# EAGLE board xmosio2_unrouted (EAGLE 7.6.0)
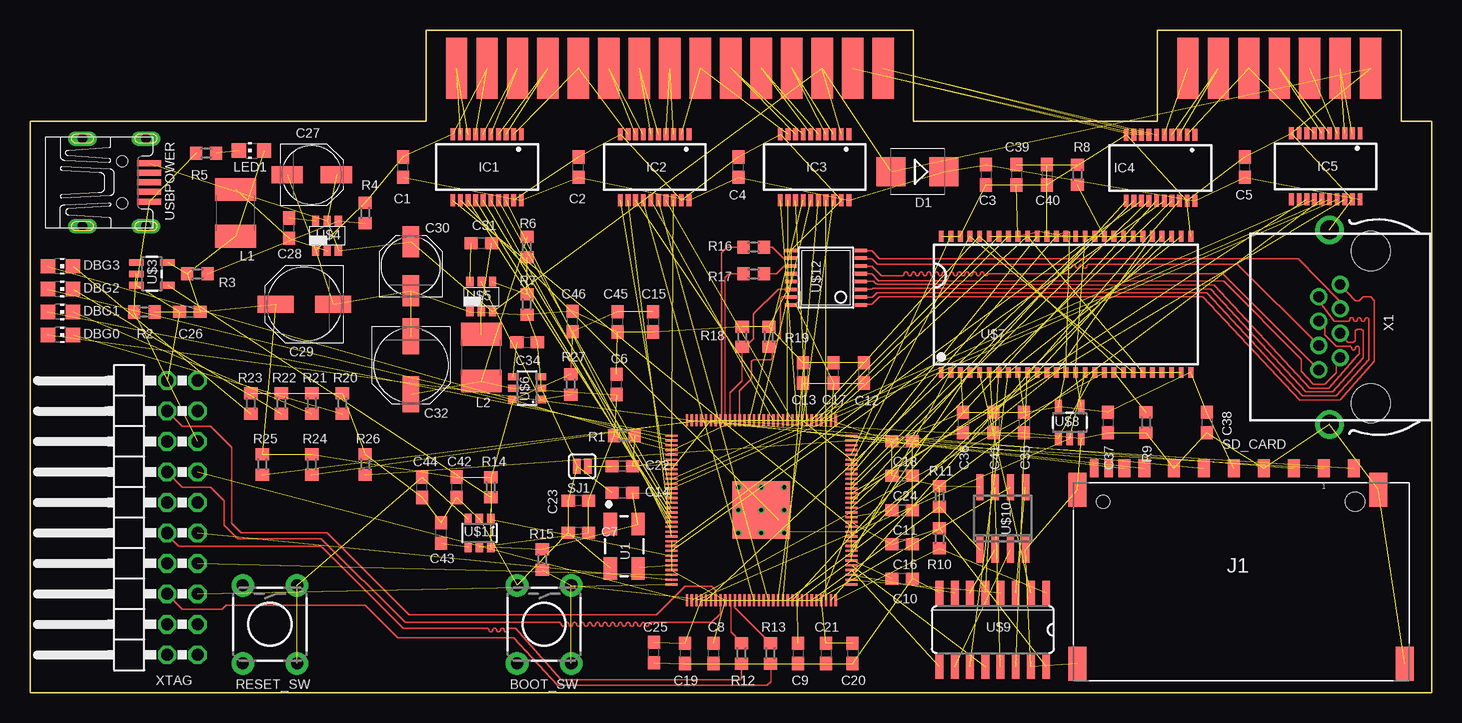
[diagram p0: board, top side]
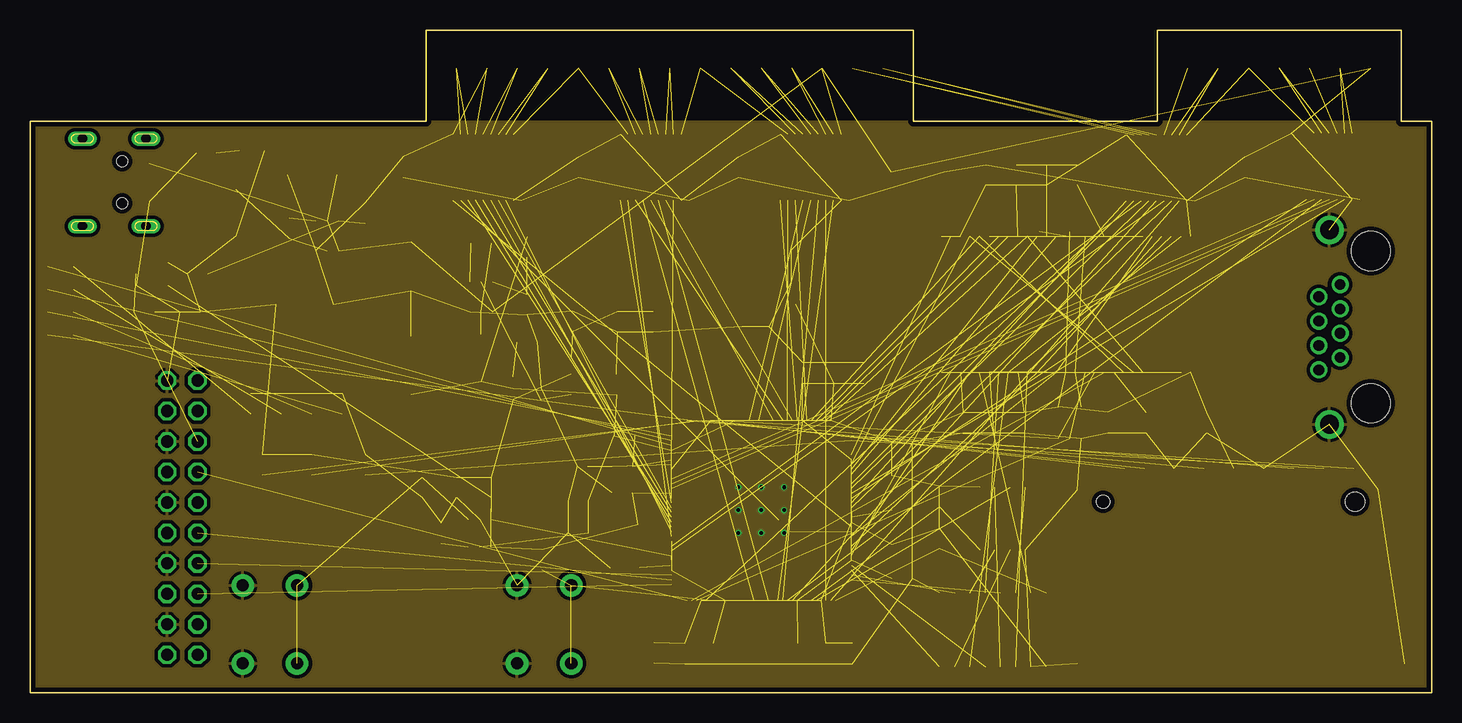
[diagram p1: board, inner layer Route2]
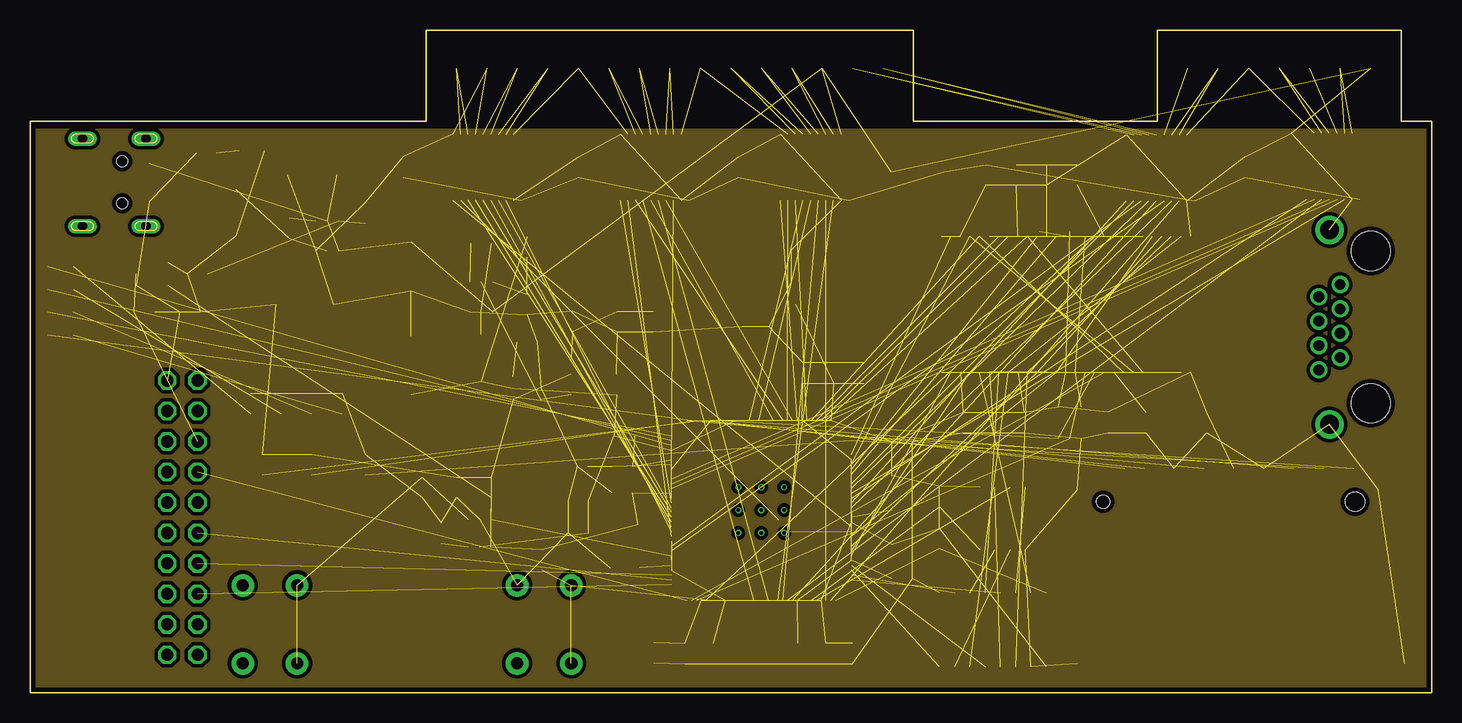
[diagram p2: board, inner layer Route15]
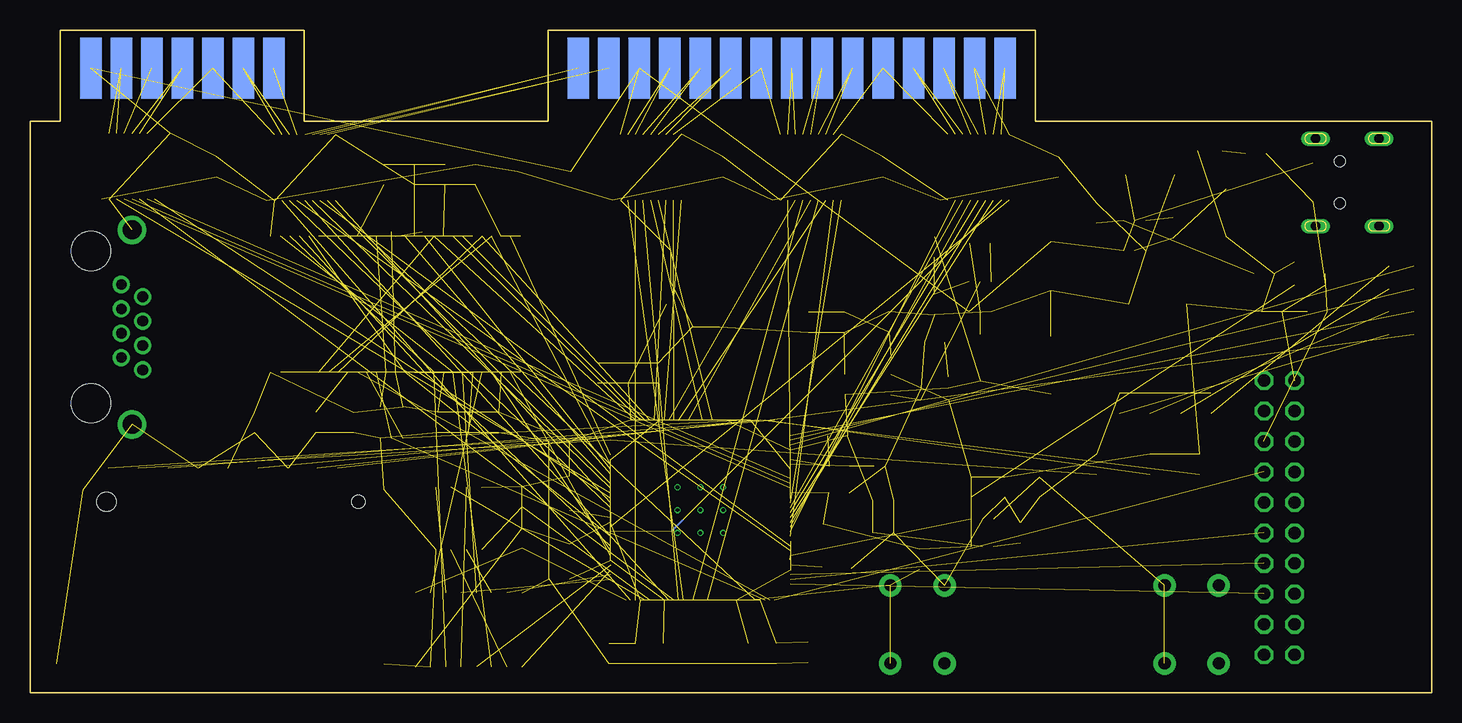
[diagram p3: board, bottom side, seen from below]

Size 116.84 x 55.24 mm. Coordinates in mm from the lower left corner, seen from the top.
Outline: 0,47.62 33.02,47.62 33.02,55.24 73.66,55.24 73.66,47.62 93.98,47.62 93.98,55.24 114.3,55.24 114.3,47.62 116.84,47.62 116.84,0 0,0 0,47.62
Copper layers (1*2*15*16): Top 0.035559375mm / dielectric 0.17018125mm / Route2 0.01778125mm / dielectric 47mil / Route15 0.01778125mm / dielectric 0.17018125mm / Bottom 0.035559375mm
Design rules "oshpark-4layer": minimum track width 5mil, minimum drill 10mil, track to track 5mil, track to pad 5mil, pad to pad 5mil, via to via 5mil, smd to smd 5mil, copper to edge 15mil, drill to drill 6mil, minimum pad ring 4mil, minimum via ring 4mil, stop-mask expansion 2.5mil, vias tented up to drill 0mil, thermal gap 10mil
Net classes: 1 Power: width 0.305 mm, drill 0.203 mm, clearance 0.203 mm
vRestrict: area 54.3,21.9 to 67.6,23.5; area 67.6,8.6 to 69.2,21.6; area 54.3,7 to 67.6,8.6; area 52.7,8.6 to 54.3,21.9

## Footprints (pad centres in the part's own frame; a part is rotated, then mirrored left to right if it is on the bottom)
TACTILE-PTH = drill 1.016 pad 1.88: 1 -3.251,2.261; 2 3.251,2.261; 3 -3.251,-2.261; 4 3.251,-2.261
C0603 = smd 1.1 x 1: 1 -0.85,0; 2 0.85,0
PANASONIC_C = smd 2.6 x 1.4: + 2.05,0; - -2.05,0
PANASONIC_D = smd 3 x 1.4: + 2.4,0; - -2.4,0
SMB = smd 2.4 x 2.4: A 2.2,0; C -2.2,0
CHIP-LED0805 = smd 1.2 x 1.2: A 0,-1.05; C 0,1.05
QSOP20 = smd 0.4 x 1: 1 -2.858,-2.75; 2 -2.223,-2.75; 3 -1.588,-2.75; 4 -0.953,-2.75; 5 -0.318,-2.75; 6 0.318,-2.75; 7 0.953,-2.75; 8 1.588,-2.75; 9 2.223,-2.75; 10 2.858,-2.75; 11 2.858,2.75; 12 2.223,2.75; 13 1.588,2.75; 14 0.953,2.75; 15 0.318,2.75; 16 -0.318,2.75; 17 -0.953,2.75; 18 -1.588,2.75; 19 -2.223,2.75; 20 -2.858,2.75
693063020911 = smd 1 x 1.5: 1 6.875,0; 2 4.375,0; 3 1.875,0; 4 -0.625,0; 5 -3.125,0; 6 -5.625,0; 7 -8.05,0; 8 -9.75,0; 9 9.375,0 | smd 0.7 x 1.5: CD -11.05,0; WP -12.25,0 | smd 1.5 x 2.8: GND1 -13.65,-1.8; GND2 11.45,-1.8; GND3 13.65,-16.3; GND4 -13.65,-16.3 | hole 1.1: -11.5,-2.8 | hole 1.6: 9.5,-2.8
L1812 = smd 1.9 x 3.4: 1 -1.95,0; 2 1.95,0
R0603 = smd 1 x 1.1: 1 -0.85,0; 2 0.85,0
SJ_2S = smd 0.635 x 1.27: 1 -0.45,0; 2 0.45,0
CRYSTAL-OSC-SMD-5X3 = smd 1.9 x 1.1: 1 -1.85,-1.15; 2 1.85,-1.15; 3 1.85,1.15; 4 -1.85,1.15
ECL_CART = smd 1.778 x 5.08: P$1 2.54,4.445; P$2 5.08,4.445; P$3 7.62,4.445; P$4 10.16,4.445; P$5 12.7,4.445; P$6 15.24,4.445; P$7 17.78,4.445; P$8 20.32,4.445; P$9 22.86,4.445; P$10 25.4,4.445; P$11 27.94,4.445; P$12 30.48,4.445; P$13 33.02,4.445; P$14 35.56,4.445; P$15 38.1,4.445; P$38 63.5,4.445; P$39 66.04,4.445; P$40 68.58,4.445; P$41 71.12,4.445; P$42 73.66,4.445; P$43 76.2,4.445; P$44 78.74,4.445 | smd 1.778 x 5.08 bottom: P$16 2.54,4.445; P$17 5.08,4.445; P$18 7.62,4.445; P$19 10.16,4.445; P$20 12.7,4.445; P$21 15.24,4.445; P$22 17.78,4.445; P$23 20.32,4.445; P$24 22.86,4.445; P$25 25.4,4.445; P$26 27.94,4.445; P$27 30.48,4.445; P$28 33.02,4.445; P$29 35.56,4.445; P$30 38.1,4.445; P$31 63.5,4.445; P$32 66.04,4.445; P$33 68.58,4.445; P$34 71.12,4.445; P$35 73.66,4.445; P$36 76.2,4.445; P$37 78.74,4.445
TQFP128 = smd 1 x 0.18: 1 -7.5,6.2; 2 -7.5,5.8; 3 -7.5,5.4; 4 -7.5,5; 5 -7.5,4.6; 6 -7.5,4.2; 7 -7.5,3.8; 8 -7.5,3.4; 9 -7.5,3; 10 -7.5,2.6; 11 -7.5,2.2; 12 -7.5,1.8; 13 -7.5,1.4; 14 -7.5,1; 15 -7.5,0.6; 16 -7.5,0.2; 17 -7.5,-0.2; 18 -7.5,-0.6; 19 -7.5,-1; 20 -7.5,-1.4; 21 -7.5,-1.8; 22 -7.5,-2.2; 23 -7.5,-2.6; 24 -7.5,-3; 25 -7.5,-3.4; 26 -7.5,-3.8; 27 -7.5,-4.2; 28 -7.5,-4.6; 29 -7.5,-5; 30 -7.5,-5.4; 31 -7.5,-5.8; 32 -7.5,-6.2; 65 7.5,-6.2; 66 7.5,-5.8; 67 7.5,-5.4; 68 7.5,-5; 69 7.5,-4.6; 70 7.5,-4.2; 71 7.5,-3.8; 72 7.5,-3.4; 73 7.5,-3; 74 7.5,-2.6; 75 7.5,-2.2; 76 7.5,-1.8; 77 7.5,-1.4; 78 7.5,-1; 79 7.5,-0.6; 80 7.5,-0.2; 81 7.5,0.2; 82 7.5,0.6; 83 7.5,1; 84 7.5,1.4; 85 7.5,1.8; 86 7.5,2.2; 87 7.5,2.6; 88 7.5,3; 89 7.5,3.4; 90 7.5,3.8; 91 7.5,4.2; 92 7.5,4.6; 93 7.5,5; 94 7.5,5.4; 95 7.5,5.8; 96 7.5,6.2 | smd 0.18 x 1: 33 -6.2,-7.5; 34 -5.8,-7.5; 35 -5.4,-7.5; 36 -5,-7.5; 37 -4.6,-7.5; 38 -4.2,-7.5; 39 -3.8,-7.5; 40 -3.4,-7.5; 41 -3,-7.5; 42 -2.6,-7.5; 43 -2.2,-7.5; 44 -1.8,-7.5; 45 -1.4,-7.5; 46 -1,-7.5; 47 -0.6,-7.5; 48 -0.2,-7.5; 49 0.2,-7.5; 50 0.6,-7.5; 51 1,-7.5; 52 1.4,-7.5; 53 1.8,-7.5; 54 2.2,-7.5; 55 2.6,-7.5; 56 3,-7.5; 57 3.4,-7.5; 58 3.8,-7.5; 59 4.2,-7.5; 60 4.6,-7.5; 61 5,-7.5; 62 5.4,-7.5; 63 5.8,-7.5; 64 6.2,-7.5; 97 6.2,7.5; 98 5.8,7.5; 99 5.4,7.5; 100 5,7.5; 101 4.6,7.5; 102 4.2,7.5; 103 3.8,7.5; 104 3.4,7.5; 105 3,7.5; 106 2.6,7.5; 107 2.2,7.5; 108 1.8,7.5; 109 1.4,7.5; 110 1,7.5; 111 0.6,7.5; 112 0.2,7.5; 113 -0.2,7.5; 114 -0.6,7.5; 115 -1,7.5; 116 -1.4,7.5; 117 -1.8,7.5; 118 -2.2,7.5; 119 -2.6,7.5; 120 -3,7.5; 121 -3.4,7.5; 122 -3.8,7.5; 123 -4.2,7.5; 124 -4.6,7.5; 125 -5,7.5; 126 -5.4,7.5; 127 -5.8,7.5; 128 -6.2,7.5 | smd 4.8 x 4.8: PAD 0,0
SOT23-5 = smd 0.55 x 1.2: 1 -0.95,-1.3; 2 0,-1.3; 3 0.95,-1.3; 4 0.95,1.3; 5 -0.95,1.3
TSOT23-6_DDC = smd 0.6 x 0.8: 1 -0.95,-1.25; 2 0,-1.25; 3 0.95,-1.25; 4 0.95,1.25; 5 0,1.25; 6 -0.95,1.25
SOT23-6 = smd 0.6 x 0.9: 1 -0.95,-1.15; 2 0,-1.15; 3 0.95,-1.15; 4 0.95,1.15; 5 0,1.15; 6 -0.95,1.15
TSOP54-400 = smd 0.4 x 0.9: 1 -10.4,-5.68; 2 -9.6,-5.68; 3 -8.8,-5.68; 4 -8,-5.68; 5 -7.2,-5.68; 6 -6.4,-5.68; 7 -5.6,-5.68; 8 -4.8,-5.68; 9 -4,-5.68; 10 -3.2,-5.68; 11 -2.4,-5.68; 12 -1.6,-5.68; 13 -0.8,-5.68; 14 0,-5.68; 15 0.8,-5.68; 16 1.6,-5.68; 17 2.4,-5.68; 18 3.2,-5.68; 19 4,-5.68; 20 4.8,-5.68; 21 5.6,-5.68; 22 6.4,-5.68; 23 7.2,-5.68; 24 8,-5.68; 25 8.8,-5.68; 26 9.6,-5.68; 27 10.4,-5.68; 28 10.4,5.68; 29 9.6,5.68; 30 8.8,5.68; 31 8,5.68; 32 7.2,5.68; 33 6.4,5.68; 34 5.6,5.68; 35 4.8,5.68; 36 4,5.68; 37 3.2,5.68; 38 2.4,5.68; 39 1.6,5.68; 40 0.8,5.68; 41 0,5.68; 42 -0.8,5.68; 43 -1.6,5.68; 44 -2.4,5.68; 45 -3.2,5.68; 46 -4,5.68; 47 -4.8,5.68; 48 -5.6,5.68; 49 -6.4,5.68; 50 -7.2,5.68; 51 -8,5.68; 52 -8.8,5.68; 53 -9.6,5.68; 54 -10.4,5.68
SO16 = smd 0.66 x 2.032: 1 -4.445,-3.073; 2 -3.175,-3.073; 3 -1.905,-3.073; 4 -0.635,-3.073; 5 0.635,-3.073; 6 1.905,-3.073; 7 3.175,-3.073; 8 4.445,-3.073; 9 4.445,3.073; 10 3.175,3.073; 11 1.905,3.073; 12 0.635,3.073; 13 -0.635,3.073; 14 -1.905,3.073; 15 -3.175,3.073; 16 -4.445,3.073
SO-08 = smd 0.6 x 2.2: 1 -1.905,-2.6; 2 -0.635,-2.6; 3 0.635,-2.6; 4 1.905,-2.6; 5 1.905,2.6; 6 0.635,2.6; 7 -0.635,2.6; 8 -1.905,2.6
TSSOP16 = smd 0.305 x 0.991: 1 -2.275,-2.918; 2 -1.625,-2.918; 3 -0.975,-2.918; 4 -0.325,-2.918; 5 0.325,-2.918; 6 0.975,-2.918; 7 1.625,-2.918; 8 2.275,-2.918; 9 2.275,2.918; 10 1.625,2.918; 11 0.975,2.918; 12 0.325,2.918; 13 -0.325,2.918; 14 -0.975,2.918; 15 -1.625,2.918; 16 -2.275,2.918
UX60-MB-5S8 = smd 2 x 0.5: 1 8.65,1.6; 2 8.65,0.8; 3 8.65,0; 4 8.65,-0.8; 5 8.65,-1.6 | drill 0.8 long: M1 3.1,-3.65; M2 3.1,3.65; M3 8.4,3.65; M4 8.4,-3.65 | hole 0.9: 6.4,-1.75; 6.4,1.75
0446200002 = drill 0.889 pad 1.422: 1 3.556,2.54; 2 2.54,4.318; 3 1.524,2.54; 4 0.508,4.318; 5 -0.508,2.54; 6 -1.524,4.318; 7 -2.54,2.54; 8 -3.556,4.318 | drill 1.575 pad 2.286: S@1 -8.103,3.429; S@2 8.103,3.429 | hole 3.251: 6.35,0; -6.35,0
2X10/90 = drill 1.016 octagon: 1 -11.43,-6.35; 2 -11.43,-3.81; 3 -8.89,-6.35; 4 -8.89,-3.81; 5 -6.35,-6.35; 6 -6.35,-3.81; 7 -3.81,-6.35; 8 -3.81,-3.81; 9 -1.27,-6.35; 10 -1.27,-3.81; 11 1.27,-6.35; 12 1.27,-3.81; 13 3.81,-6.35; 14 3.81,-3.81; 15 6.35,-6.35; 16 6.35,-3.81; 17 8.89,-6.35; 18 8.89,-3.81; 19 11.43,-6.35; 20 11.43,-3.81

## Placement (x,y rotation side)
BOOT_SW  FLASH_MODE  [TACTILE-PTH]  42.86,5.71 270 top
C1  100nF  [C0603]  31.11,43.81 90 top
C2  100nF  [C0603]  45.72,43.81 90 top
C3  100nF  [C0603]  79.69,43.18 270 top
C4  100nF  [C0603]  59.05,43.81 90 top
C5  100nF  [C0603]  101.28,43.81 90 top
C6  100nF  [C0603]  48.9,25.72 90 top
C7  100nF  [C0603]  45.72,13.34 180 top
C8  100nF  [C0603]  56.96,3.3 270 top
C9  100nF  [C0603]  64.01,3.3 270 top
C10  100nF  [C0603]  72.71,9.53 0 top
C11  100nF  [C0603]  72.71,15.24 0 top
C12  100nF  [C0603]  69.53,26.67 90 top
C13  100nF  [C0603]  64.45,26.67 90 top
C14  100nF  [C0603]  49.37,16.67 180 top
C15  100nF  [C0603]  51.94,30.92 270 top
C16  100nF  [C0603]  72.71,12.38 0 top
C17  100nF  [C0603]  66.99,26.67 90 top
C18  100nF  [C0603]  72.71,20.95 0 top
C19  100nF  [C0603]  54.61,3.3 270 top
C20  100nF  [C0603]  68.58,3.3 270 top
C21  100nF  [C0603]  66.36,3.3 270 top
C22  100nF  [C0603]  49.37,18.89 180 top
C23  10uF  [C0603]  45.72,16.03 180 top
C24  10uF  [C0603]  72.71,18.1 0 top
C25  10nF  [C0603]  52.01,3.37 90 top
C26  100nF  [C0603]  13.34,31.75 180 top
C27  22uF  [PANASONIC_C]  23.5,43.18 0 top
C28  100nF  [C0603]  21.59,38.73 90 top
C29  47uF  [PANASONIC_D]  22.86,32.38 180 top
C30  22uF  [PANASONIC_C]  31.75,35.56 90 top
C31  100nF  [C0603]  37.62,37.47 180 top
C32  47uF  [PANASONIC_D]  31.75,27.3 270 top
C34  120pF  [C0603]  41.43,29.21 0 top
C35  100nF  [C0603]  82.87,22.54 270 top
C36  100nF  [C0603]  77.79,22.54 270 top
C37  100nF  [C0603]  89.85,22.54 270 top
C38  100nF  [C0603]  98.11,22.54 270 top
C39  100nF  [C0603]  82.23,43.18 270 top
C40  100nF  [C0603]  84.77,43.18 270 top
C41  100nF  [C0603]  80.33,22.54 270 top
C42  100nF  [C0603]  35.56,17.14 270 top
C43  120pF  [C0603]  34.29,13.34 90 top
C44  10nF  [C0603]  32.7,17.14 90 top
C45  100nF  [C0603]  48.96,30.92 270 top
C46  100nF  [C0603]  45.24,30.96 90 top
D1  MURS120-E3  [SMB]  73.98,43.43 180 top
DBG0  ok33  [CHIP-LED0805]  2.54,29.84 270 top
DBG1  ok33  [CHIP-LED0805]  2.54,31.75 270 top
DBG2  ok33  [CHIP-LED0805]  2.54,33.66 270 top
DBG3  ok33  [CHIP-LED0805]  2.54,35.56 270 top
IC1  IDTQS3245QSOP20  [QSOP20]  38.1,43.81 180 top
IC2  IDTQS3245QSOP20  [QSOP20]  52.07,43.81 180 top
IC3  IDTQS3245QSOP20  [QSOP20]  65.41,43.81 180 top
IC4  IDTQS3245QSOP20  [QSOP20]  94.23,43.75 180 top
IC5  IDTQS3245QSOP20  [QSOP20]  108.01,43.88 180 top
J1  [693063020911]  100.97,18.73 0 top
L1  2.2uH  [L1812]  17.14,40.01 90 top
L2  2.2uH  [L1812]  37.62,27.94 90 top
LED1  ok33  [CHIP-LED0805]  18.47,45.2 90 top
R1  4R7  [R0603]  49.53,21.43 180 top
R2  47K  [R0603]  9.53,31.75 0 top
R3  34K  [R0603]  13.97,34.92 180 top
R4  10K  [R0603]  27.94,40.01 270 top
R5  180R  [R0603]  14.69,44.98 0 top
R6  5K1  [R0603]  41.43,37.15 90 top
R7  16K  [R0603]  41.43,32.38 90 top
R8  10K  [R0603]  87.31,43.18 270 top
R9  10K  [R0603]  93.03,22.54 90 top
R10  10K  [R0603]  75.82,12.89 270 top
R11  10K  [R0603]  75.82,16.38 270 top
R12  33R  [R0603]  59.31,3.3 270 top
R13  33R  [R0603]  61.72,3.3 270 top
R14  47K  [R0603]  38.42,17.14 90 top
R15  10K  [R0603]  42.7,11.11 90 top
R16  0R  [R0603]  60.33,37.15 0 top
R17  0R  [R0603]  60.33,34.92 0 top
R18  47K  [R0603]  59.37,29.69 270 top
R19  47K  [R0603]  61.59,29.69 270 top
R20  1K  [R0603]  26.04,24.13 90 top
R21  1K  [R0603]  23.5,24.13 90 top
R22  1K  [R0603]  20.95,24.13 90 top
R23  1K  [R0603]  18.41,24.13 90 top
R24  10K  [R0603]  23.5,19.05 90 top
R25  10K  [R0603]  19.37,19.05 90 top
R26  10K  [R0603]  27.94,19.05 90 top
R27  47K  [R0603]  45.09,25.72 90 top
RESET_SW  MANUAL_RESET  [TACTILE-PTH]  20,5.71 270 top
SJ1  SOLDERJUMPERNC  [SJ_2S]  46.04,18.89 0 top
U1  24 MHz Osc. (F535L-24)  [CRYSTAL-OSC-SMD-5X3]  49.53,12.22 270 top
U$1  ECL_CART  [ECL_CART]  33.02,47.62 0 top
U$2  XL216-512-TQ128  [TQFP128]  60.96,15.24 90 top
U$3  74LVC1G07SE-7  [SOT23-5]  10.16,34.92 270 top
U$4  TPS561208DDCR  [TSOT23-6_DDC]  24.77,38.1 0 top
U$5  TPS561208DDCR  [TSOT23-6_DDC]  37.62,33.02 0 top
U$6  TPS3808G33DBVR  [SOT23-6]  41.43,25.4 90 top
U$7  W9852G6KH  [TSOP54-400]  86.36,32.38 0 top
U$8  SN74LVC1G02  [SOT23-5]  86.68,22.54 0 top
U$9  SN74CBTLV3257  [SO16]  80.26,5.27 180 top
U$10  IS25LP080D-JNLE  [SO-08]  81.09,14.54 0 top
U$11  TPS3808G09DBVR  [SOT23-6]  37.47,13.34 180 top
U$12  FIN1049MTCX  [TSSOP16]  66.36,34.61 90 top
USBPOWER  MINI-USB-UX60-MB-5S8  [UX60-MB-5S8]  1.27,42.55 0 top
X1  0446200002  [0446200002]  111.76,30.48 90 top
XTAG  1175-1618-ND  [2X10/90]  7.62,14.61 90 top

## Library data of the parts
BOOT_SW RESET_SW SJ1 U1 = SparkFun
C1-C32 C34-C46 L1 L2 R1-R27 = rcl
D1 = diode
DBG0 DBG1-DBG3 LED1 = led
IC1-IC5 = IDTQS_3245QG
J1 = InputOutputIO (rev17e)
U$1 = atari
U$2 = Eagle_XMOS_Lib_COMPLETE
U$3 U$8 U$9 = sjg-logic
U$4-U$6 U$11 = sjg-power
U$7 = sjg-sdram
U$10 = sjg-qspi
U$12 = sjg-isolation
USBPOWER = con-hirose; OC_FARNELL: unknown; OC_NEWARK: unknown
X1 = con-molex; MF: MOLEX; MPN: 0446200002; OC_FARNELL: 9251910
XTAG = pinhead

## Nets
!QSPI_CS!: R11.2 U$2.27 U$10.1
!RESET!: R14.1 U$2.122 U$2.123 U$3.4 U$11.1
!SD_CAS!: U$2.90 U$7.17 U$8.1
!SD_ENABLE!: R10.2 U$2.32 U$9.1
!SD_RAS!: U$2.2 U$7.18
!SD_WE!: U$2.3 U$7.16 U$8.2
!X_CCTL!: IC4.14 U$2.53
!X_D1XX!: IC5.13 U$2.51
!X_EXSEL!: IC4.15 U$2.23
!X_HALT!: IC4.18 U$2.31
!X_IRQ!: IC4.16 U$2.121
!X_MPD!: IC5.15 U$2.22
!X_REF!: IC5.18 U$2.52
!X_RST!: IC4.17 U$2.49
!X_S4!: IC1.12 U$2.44
!X_S5!: IC3.17 U$2.30
+4.3V: C1.1 C2.1 C3.1 C4.1 C5.1 D1.C IC1.20 IC2.20 IC3.20 IC4.20 IC5.20
+5V [Power]: C27.+ C30.+ D1.A U$1.P$28 U$1.P$37 U$4.3 U$4.5 U$5.3 USBPOWER.1
B1: IC1.9 U$1.P$1
B2: IC1.8 U$1.P$16
B3: IC1.7 U$1.P$17
B4: IC1.6 U$1.P$3
B5: IC1.5 U$1.P$18
B6: IC1.4 U$1.P$4
B7: IC1.3 U$1.P$19
B8: IC1.2 U$1.P$5
B9: IC2.9 U$1.P$20
B10: IC2.8 U$1.P$6
B11: IC2.7 U$1.P$21
B12: IC2.6 U$1.P$7
B13: IC2.5 U$1.P$22
B14: IC2.4 U$1.P$8
B15: IC2.3 U$1.P$23
B16: IC2.2 U$1.P$9
B17: IC3.9 U$1.P$24
B18: IC3.8 U$1.P$10
B19: IC3.7 U$1.P$25
B20: IC3.6 U$1.P$11
B21: IC3.5 U$1.P$26
B22: IC3.4 U$1.P$12
B23: IC3.3 U$1.P$27
B24: IC3.2 U$1.P$13
B25: IC4.9 U$1.P$14
B26: IC4.8 U$1.P$29
B27: IC4.7 U$1.P$15
B28: IC4.6 U$1.P$30
B29: IC4.5 U$1.P$31
B30: IC4.4 U$1.P$39
B31: IC4.3 U$1.P$32
B32: IC4.2 U$1.P$40
B33: IC5.7 U$1.P$33
B34: IC5.6 U$1.P$41
B35: IC5.5 U$1.P$34
B36: IC5.4 U$1.P$42
B37: IC5.3 U$1.P$43
B38: IC5.2 U$1.P$36
DOUT1_N: U$12.8 X1.3
DOUT1_P: U$12.7 X1.6
DOUT2_N: U$12.5 X1.7
DOUT2_P: U$12.6 X1.8
EN_1V0 [Power]: R27.1 U$5.5 U$6.1
GND: BOOT_SW.3 BOOT_SW.4 C1.2 C2.2 C3.2 C4.2 C5.2 C6.2 C7.2 C8.2 C9.2 C10.2 C11.2 C12.2 C13.2 C14.2 C15.2 C16.2 C17.2 C18.2 C19.2 C20.2 C21.2 C23.2 C24.2 C25.1 C26.2 C27.- C29.- C30.- C32.- C34.2 C35.2 C36.2 C37.2 C38.2 C39.2 C40.2 C41.2 C42.2 C43.2 C44.1 C45.2 C46.2 IC1.10 IC1.19 IC2.10 IC2.19 IC3.10 IC3.19 IC4.10 IC4.19 IC5.10 IC5.19 J1.3 J1.6 J1.GND1 J1.GND2 J1.GND3 J1.GND4 R4.1 R5.1 R7.1 R9.1 R18.1 R19.1 R20.2 R21.2 R22.2 R23.2 R26.2 RESET_SW.3 RESET_SW.4 SJ1.1 U1.2 U$1.P$2 U$1.P$44 U$2.PAD U$3.3 U$4.1 U$5.1 U$6.2 U$7.6 U$7.12 U$7.28 U$7.41 U$7.46 U$7.52 U$7.54 U$8.3 U$9.8 U$9.15 U$10.4 U$11.2 U$12.9 U$12.13 USBPOWER.5 X1.S@1 X1.S@2 XTAG.4 XTAG.8 XTAG.12 XTAG.16 XTAG.20
JTAG_DN0: U$2.8 XTAG.14
JTAG_DN1: U$2.7 XTAG.18
JTAG_UP0: R12.2 XTAG.10
JTAG_UP1: R13.2 XTAG.6
LED0: DBG0.A U$2.95
LED1: DBG1.A U$2.97
LED2: DBG2.A U$2.98
LED3: DBG3.A U$2.99
LNK_IN0: R18.2 U$2.87 U$12.14
LNK_IN1: R19.2 U$2.85 U$12.15
LNK_OUT0: R17.2 U$12.11
LNK_OUT1: R16.2 U$12.10
N$1: C22.1 R1.1 U$2.102
N$2: U1.3 U$2.124
N$3: C22.2 SJ1.2 U$2.103
N$4: C28.2 U$4.6
N$5: R2.1 U$3.2 XTAG.15
N$6: C43.1 U$11.4
N$7 [Power]: C28.1 L1.2 U$4.2
N$8 [Power]: C31.2 U$5.6
N$9 [Power]: R3.1 R4.2 U$4.4
N$10: LED1.C R5.2
N$11 [Power]: C31.1 L2.2 U$5.2
N$12 [Power]: R6.1 R7.2 U$5.4
N$13 [Power]: C34.1 U$6.4
N$14: U$7.15 U$7.39 U$8.4
N$15: R8.2 U$7.37
N$16: U$9.3 U$10.5
N$17: R9.2 U$7.19
N$18: U$9.6 U$10.2
N$19: U$9.10 U$10.3
N$20: U$9.13 U$10.7
N$21: C44.2 RESET_SW.1 RESET_SW.2 U$11.3
N$22: R12.1 U$2.10
N$23: R13.1 U$2.11
N$24: DBG3.C R23.1
N$25: DBG2.C R22.1
N$26: DBG1.C R21.1
N$27: DBG0.C R20.1
N$28: R17.1 U$2.88
N$29: R16.1 U$2.89
N$33: BOOT_SW.1 BOOT_SW.2 R15.1 U$2.6
N$40: J1.CD
N$41: J1.WP
QSPI_CLK: U$2.28 U$10.6
RIN1_N: U$12.1 X1.1
RIN1_P: U$12.2 X1.2
RIN2_N: U$12.4 X1.4
RIN2_P: U$12.3 X1.5
SD_ADQ0: U$2.39 U$7.2 U$7.23
SD_ADQ1: U$2.40 U$7.4 U$7.24
SD_ADQ2: U$7.5 U$7.25 U$9.2
SD_ADQ2/QS_D0: U$2.34 U$9.4
SD_ADQ3: U$7.7 U$7.26 U$9.5
SD_ADQ3/QS_D1: U$2.35 U$9.7
SD_ADQ4: U$7.8 U$7.29 U$9.11
SD_ADQ4/QS_D2: U$2.36 U$9.9
SD_ADQ5: U$7.10 U$7.30 U$9.14
SD_ADQ5/QS_D3: U$2.37 U$9.12
SD_ADQ6: U$2.41 U$7.11 U$7.31
SD_ADQ7: U$2.43 U$7.13 U$7.32
SD_ADQ8: U$2.56 U$7.33 U$7.42
SD_ADQ9: U$2.57 U$7.34 U$7.44
SD_ADQ10: U$2.67 U$7.22 U$7.45
SD_ADQ11: U$2.68 U$7.35 U$7.47
SD_ADQ12: U$2.69 U$7.36 U$7.48
SD_ADQ13: U$2.70 U$7.20 U$7.50
SD_ADQ14: U$2.58 U$7.21 U$7.51
SD_ADQ15: U$2.60 U$7.53
SD_CLK: U$2.5 U$7.38
SDC_CLK: J1.5 U$2.96
SDC_CMD: J1.2 R24.1 U$2.94
SDC_D0: J1.7 R25.1 U$2.93
SDC_D1: J1.8 U$2.92
SDC_D2: J1.9 U$2.64
SDC_D3: J1.1 R26.1 U$2.63
TCK: U$2.127 XTAG.9
TDI: U$2.128 XTAG.5
TDO: U$2.1 XTAG.13
TMS: U$2.126 XTAG.7
VCCINT: C6.1 C7.1 C8.1 C9.1 C10.1 C11.1 C12.1 C13.1 C23.1 C32.+ L2.1 R1.2 R6.2 U$2.9 U$2.16 U$2.17 U$2.24 U$2.38 U$2.42 U$2.47 U$2.55 U$2.59 U$2.72 U$2.79 U$2.80 U$2.86 U$2.100 U$2.101 U$2.119 U$2.125 U$6.5 U$11.5
VCCIO: C14.1 C15.1 C16.1 C17.1 C18.1 C19.1 C20.1 C21.1 C24.1 C25.2 C26.1 C29.+ C35.1 C36.1 C37.1 C38.1 C39.1 C40.1 C41.1 C42.1 C45.1 C46.1 J1.4 L1.1 LED1.A R2.2 R3.2 R8.1 R10.1 R11.1 R14.2 R15.2 R24.2 R25.2 R27.2 U1.4 U$2.4 U$2.13 U$2.19 U$2.29 U$2.46 U$2.48 U$2.66 U$2.77 U$2.82 U$2.91 U$2.104 U$2.109 U$2.110 U$3.5 U$6.6 U$7.1 U$7.3 U$7.9 U$7.14 U$7.27 U$7.43 U$7.49 U$8.5 U$9.16 U$10.8 U$11.6 U$12.12 U$12.16
X_A0: IC2.11 U$2.111
X_A1: IC1.17 U$2.112
X_A2: IC1.15 U$2.113
X_A3: IC1.13 U$2.114
X_A4: IC1.14 U$2.115
X_A5: IC1.16 U$2.116
X_A6: IC1.18 U$2.117
X_A7: IC2.12 U$2.118
X_A8: IC2.14 U$2.15
X_A9: IC2.16 U$2.18
X_A10: IC3.18 U$2.20
X_A11: IC3.16 U$2.21
X_A12: IC2.18 U$2.105
X_A13: IC5.14 U$2.106
X_A14: IC5.16 U$2.107
X_A15: IC5.17 U$2.108
X_B02: IC4.13 U$2.120
X_D0: IC3.13 U$2.71
X_D1: IC3.11 U$2.73
X_D2: IC2.17 U$2.74
X_D3: IC3.12 U$2.75
X_D4: IC2.13 U$2.76
X_D5: IC2.15 U$2.78
X_D6: IC3.15 U$2.81
X_D7: IC3.14 U$2.83
X_R/!W!: IC4.11 U$2.50
X_RD4: IC1.11 U$2.45
X_RD5: IC4.12 U$2.54

## Tracks (layer width: path | path; a pad name or v marks a point on that pad's centre or on a via)
!QSPI_CS!  (2 unrouted)
!RESET!  (4 unrouted)
  Top 0.127: 53.5,11.11 U$2.123
!SD_CAS!  (2 unrouted)
!SD_ENABLE!  (2 unrouted)
!SD_RAS!  (1 unrouted)
!SD_WE!  (2 unrouted)
!X_CCTL!  (1 unrouted)
!X_D1XX!  (1 unrouted)
!X_EXSEL!  (1 unrouted)
!X_HALT!  (1 unrouted)
!X_IRQ!  (1 unrouted)
!X_MPD!  (1 unrouted)
!X_REF!  (1 unrouted)
!X_RST!  (1 unrouted)
!X_S4!  (2 unrouted)
  Bottom 0.127: 62.39,14.45 63.34,13.49
!X_S5!  (1 unrouted)
+4.3V  (10 unrouted)
+5V  (8 unrouted)
B1  (1 unrouted)
B2  (1 unrouted)
B3  (1 unrouted)
B4  (1 unrouted)
B5  (1 unrouted)
B6  (1 unrouted)
B7  (1 unrouted)
B8  (1 unrouted)
B9  (1 unrouted)
B10  (1 unrouted)
B11  (1 unrouted)
B12  (1 unrouted)
B13  (1 unrouted)
B14  (1 unrouted)
B15  (1 unrouted)
B16  (1 unrouted)
B17  (1 unrouted)
B18  (1 unrouted)
B19  (1 unrouted)
B20  (1 unrouted)
B21  (1 unrouted)
B22  (1 unrouted)
B23  (1 unrouted)
B24  (1 unrouted)
B25  (1 unrouted)
B26  (1 unrouted)
B27  (1 unrouted)
B28  (1 unrouted)
B29  (1 unrouted)
B30  (1 unrouted)
B31  (1 unrouted)
B32  (1 unrouted)
B33  (1 unrouted)
B34  (1 unrouted)
B35  (1 unrouted)
B36  (1 unrouted)
B37  (1 unrouted)
B38  (1 unrouted)
DOUT1_N
  Top 0.127: X1.3 109.16,32.07 109.16,32.7 105.73,36.2 70.8,36.2 70.17,36.83 69.33,36.83 U$12.8
DOUT1_P
  Top 0.127: X1.6 100.65,35.72 88.27,35.72 arc90 88.11,35.56 arc-90 87.95,35.4 arc-90 87.79,35.56 arc90 87.63,35.72 arc90 87.47,35.56 arc-90 87.31,35.4 arc-90 87.15,35.56 arc90 87,35.72 arc90 86.84,35.56 arc-90 86.68,35.4 arc-90 86.52,35.56 arc90 86.36,35.72 70.64,35.72 70.17,36.2 69.31,36.2 U$12.7
DOUT2_N
  Top 0.127: X1.7 108.9,27.62 108.9,26.67 107.95,25.72 107,25.72 105.98,26.8 105.98,27.81 99.5,34.29 76.52,34.37 70.72,34.37 70.17,34.92 U$12.5
DOUT2_P
  Top 0.127: X1.8 99.44,34.92 79.85,34.92 arc-90 79.69,34.77 arc-90 79.53,34.92 arc90 79.38,35.08 arc90 79.22,34.92 arc-90 79.06,34.77 arc-90 78.9,34.92 arc90 78.74,35.08 arc90 78.58,34.92 arc-90 78.42,34.77 arc-90 78.26,34.92 arc90 78.11,35.08 arc90 77.95,34.92 arc-90 77.79,34.77 arc-90 77.63,34.92 arc90 77.47,35.08 arc90 77.31,34.92 arc-90 77.15,34.77 arc-90 76.99,34.92 arc90 76.83,35.08 arc90 76.68,34.92 arc-90 76.52,34.77 arc-90 76.36,34.92 arc90 76.2,35.08 arc90 76.04,34.92 arc-90 75.88,34.77 arc-90 75.72,34.92 arc90 75.56,35.08 arc90 75.41,34.92 arc-90 75.25,34.77 arc-90 75.09,34.92 arc90 74.93,35.08 arc90 74.77,34.92 arc-90 74.61,34.77 arc-90 74.45,34.92 arc90 74.3,35.08 arc90 74.14,34.92 arc-90 73.98,34.77 arc-90 73.82,34.92 arc90 73.66,35.08 arc90 73.5,34.92 arc-90 73.34,34.77 arc-90 73.18,34.92 arc90 73.03,35.08 arc90 72.87,34.92 arc-90 72.71,34.77 arc-5 71.28,34.77 70.96,34.77 70.17,35.56 69.3,35.56 U$12.6
EN_1V0  (2 unrouted)
GND  (via drill 0.3)  (92 unrouted)
  Top 0.127: 84.14,38.42 U$7.46
  other vias: 60.96,15.24 59.05,15.24 59.05,17.14 60.96,17.14 62.87,17.14 62.87,15.24 62.87,13.34 60.96,13.34 59.05,13.34
  pour Route2 (isolate 0.305): 0,47.62 116.84,47.62 116.84,0 0,0
JTAG_DN0
  Top 0.127: XTAG.14 12.7,17.14 15.08,17.14 16.19,16.03 16.19,13.97 17.3,12.86 24.29,12.86 31.27,5.87 44.13,5.87 arc-90 44.29,5.71 arc90 44.45,5.56 arc90 44.61,5.71 arc-90 44.77,5.87 arc-90 44.93,5.71 arc90 45.09,5.56 arc90 45.24,5.71 arc-90 45.4,5.87 arc-90 45.56,5.71 arc90 45.72,5.56 arc90 45.88,5.71 arc-90 46.04,5.87 arc-90 46.2,5.71 arc90 46.35,5.56 arc90 46.51,5.71 arc-90 46.67,5.87 arc-90 46.83,5.71 arc90 46.99,5.56 arc90 47.15,5.71 arc-90 47.31,5.87 arc-90 47.47,5.71 arc90 47.62,5.56 arc90 47.78,5.71 arc-90 47.94,5.87 arc-90 48.1,5.71 arc90 48.26,5.56 arc90 48.42,5.71 arc-90 48.58,5.87 arc-90 48.74,5.71 arc90 48.9,5.56 arc90 49.05,5.71 arc-90 49.21,5.87 arc-90 49.37,5.71 arc90 49.53,5.56 arc90 49.69,5.71 arc-90 49.85,5.87 arc-90 50.01,5.71 arc90 50.16,5.56 arc90 50.32,5.71 arc-90 50.48,5.87 arc-90 50.64,5.71 arc90 50.8,5.56 arc90 50.96,5.71 arc-90 51.12,5.87 arc-90 51.28,5.71 arc90 51.44,5.56 arc90 51.59,5.71 arc-90 51.75,5.87 56.83,5.87 57.56,6.6 U$2.8
JTAG_DN1
  Top 0.127: U$2.7 57.15,8.57 56.83,8.89 54.61,8.89 52.23,6.51 31.59,6.51 24.77,13.34 17.62,13.34 16.83,14.13 16.83,20.48 15.08,22.23 12.7,22.23 XTAG.18
JTAG_UP0
  Top 0.127: R12.2 59.31,1.33 59.37,1.27 59.21,1.11 44.29,1.11 40.48,5.4 40.01,5.4 arc90 39.85,5.24 arc-90 39.69,5.08 arc-90 39.53,5.24 arc90 39.37,5.4 arc90 39.21,5.24 arc-90 39.05,5.08 arc-90 38.89,5.24 arc90 38.73,5.4 arc90 38.58,5.24 arc-90 38.42,5.08 arc-90 38.26,5.24 arc90 38.1,5.4 31.11,5.4 24.29,12.22 12.38,12.22 11.43,13.18 XTAG.10
JTAG_UP1
  Top 0.127: XTAG.6 12.7,6.99 16.03,6.99 16.35,7.3 27.94,7.3 30.64,4.6 40.32,4.6 43.97,0.64 61.44,0.64 61.75,0.95 61.75,2.42 R13.2
LED0  (1 unrouted)
LED1  (1 unrouted)
LED2  (1 unrouted)
LED3  (1 unrouted)
LNK_IN0
  Top 0.127: U$2.87 58.36,25.02 59.37,26.04 R18.2 59.63,28.84 60.33,29.53 60.33,31.59 62.39,33.66 63.42,33.66 U$12.14
LNK_IN1
  Top 0.127: U$2.85 59.16,25.19 60.17,26.19 60.17,27.62 60.33,27.78 61.75,27.78 61.91,27.94 61.91,28.42 R19.2 61.7,28.84 62.55,29.69 62.55,32.86 62.71,33.02 63.4,33.02 U$12.15
LNK_OUT0
  Top 0.127: R17.2 62.23,34.92 62.87,35.56 63.42,35.56 U$12.11
LNK_OUT1
  Top 0.127: R16.2 61.91,37.15 62.87,36.2 63.4,36.2 U$12.10
N$1  (2 unrouted)
N$2  (1 unrouted)
  Top 0.127: 53.34,10.64 U$2.124 | 50.8,10.48 U1.3
N$3  (2 unrouted)
N$4  (1 unrouted)
N$5  (2 unrouted)
N$6  (1 unrouted)
N$7  (2 unrouted)
N$8  (1 unrouted)
N$9  (2 unrouted)
N$10  (1 unrouted)
N$11  (2 unrouted)
N$12  (2 unrouted)
N$13  (1 unrouted)
  Top 0.305: 40.32,26.35 U$6.4
N$14  (2 unrouted)
N$15  (1 unrouted)
N$16  (1 unrouted)
N$17  (1 unrouted)
N$18  (1 unrouted)
N$19  (1 unrouted)
N$20  (1 unrouted)
N$21  (3 unrouted)
N$22
  Top 0.127: U$2.10 58.42,7.62 58.42,5.08 59.21,4.29 R12.1
N$23
  Top 0.127: U$2.11 58.74,7.62 58.74,7.14 61.59,4.29 R13.1
N$24  (1 unrouted)
N$25  (1 unrouted)
N$26  (1 unrouted)
N$27  (1 unrouted)
N$28
  Top 0.127: U$2.88 57.94,22.74 57.94,34.61 58.26,34.92 R17.1
N$29
  Top 0.127: U$2.89 57.63,22.81 57.63,36.67 58.1,37.15 R16.1
N$33  (3 unrouted)
QSPI_CLK  (1 unrouted)
RIN1_N
  Top 0.127: X1.1 110.49,32.7 110.81,32.7 111.12,33.02 111.76,33.02 112.08,32.7 112.08,27.62 109.22,24.45 105.86,24.38 97.79,33.02 70.8,33.02 70.17,32.38 69.33,32.38 U$12.1
RIN1_P
  Top 0.127: X1.2 107.44,32.7 108.74,30.96 109.86,30.96 arc90 110.01,31.11 arc-90 110.17,31.27 arc-90 110.33,31.11 arc90 110.49,30.96 arc90 110.65,31.11 arc-90 110.81,31.27 arc-90 110.97,31.11 arc90 111.12,30.96 arc90 111.28,31.11 arc-90 111.44,31.27 arc-90 111.6,31.11 111.6,27.78 108.9,24.77 106.05,24.77 98.11,33.34 70.59,33.34 70.22,32.97 U$12.2
RIN2_N
  Top 0.127: U$12.4 70.33,34.29 70.54,34.08 70.59,34.08 70.62,34.05 76.52,34.05 98.74,33.97 106.68,25.4 108.27,25.4 110.65,28.1 arc-7 110.81,28.26 110.81,28.73 arc90 110.65,28.89 arc90 110.49,28.73 arc-90 110.33,28.57 arc-90 110.17,28.73 arc90 110.01,28.89 108.9,28.89 107.95,29.84 107.95,30.48 X1.4
RIN2_P
  Top 0.127: X1.5 109.86,29.21 110.33,29.21 110.49,29.37 110.49,30.16 110.65,30.32 110.97,30.32 111.12,30.16 111.12,27.94 108.58,25.08 106.36,25.08 98.42,33.66 76.52,33.73 70.25,33.73 70.17,33.66 69.3,33.66 U$12.3
SD_ADQ0  (2 unrouted)
SD_ADQ1  (2 unrouted)
SD_ADQ2  (2 unrouted)
SD_ADQ2/QS_D0  (1 unrouted)
SD_ADQ3  (2 unrouted)
SD_ADQ3/QS_D1  (1 unrouted)
SD_ADQ4  (2 unrouted)
SD_ADQ4/QS_D2  (1 unrouted)
SD_ADQ5  (2 unrouted)
SD_ADQ5/QS_D3  (1 unrouted)
SD_ADQ6  (2 unrouted)
SD_ADQ7  (2 unrouted)
SD_ADQ8  (2 unrouted)
SD_ADQ9  (2 unrouted)
SD_ADQ10  (2 unrouted)
SD_ADQ11  (2 unrouted)
SD_ADQ12  (2 unrouted)
SD_ADQ13  (2 unrouted)
SD_ADQ14  (2 unrouted)
SD_ADQ15  (1 unrouted)
SD_CLK  (1 unrouted)
SDC_CLK  (1 unrouted)
SDC_CMD  (2 unrouted)
SDC_D0  (2 unrouted)
SDC_D1  (1 unrouted)
SDC_D2  (1 unrouted)
SDC_D3  (2 unrouted)
TCK  (1 unrouted)
TDI  (1 unrouted)
TDO  (1 unrouted)
TMS  (1 unrouted)
VCCINT  (31 unrouted)
VCCIO  (62 unrouted)
  Top 0.127: 45.09,27.94 R27.2 | U$12.16 63.5,32.38 63.82,32.38 64.14,32.7 64.14,34.61 63.82,34.92 63.5,34.92 U$12.12 | 86.68,38.42 U$7.43
  pour Route15 (isolate 0.305): 0,46.99 116.84,46.99 116.84,0 0,0
X_A0  (1 unrouted)
X_A1  (1 unrouted)
X_A2  (1 unrouted)
X_A3  (1 unrouted)
X_A4  (1 unrouted)
X_A5  (1 unrouted)
X_A6  (1 unrouted)
X_A7  (1 unrouted)
X_A8  (1 unrouted)
X_A9  (1 unrouted)
X_A10  (1 unrouted)
X_A11  (1 unrouted)
X_A12  (1 unrouted)
X_A13  (1 unrouted)
X_A14  (1 unrouted)
X_A15  (1 unrouted)
X_B02  (1 unrouted)
X_D0  (1 unrouted)
X_D1  (1 unrouted)
X_D2  (1 unrouted)
X_D3  (1 unrouted)
X_D4  (1 unrouted)
X_D5  (1 unrouted)
X_D6  (1 unrouted)
X_D7  (1 unrouted)
X_R/!W!  (1 unrouted)
X_RD4  (1 unrouted)
X_RD5  (1 unrouted)

## Text on the board
tPlace: SD_CARD